# EAGLE board Schematic rangkaian krsri-1_final (EAGLE 9.6.1)
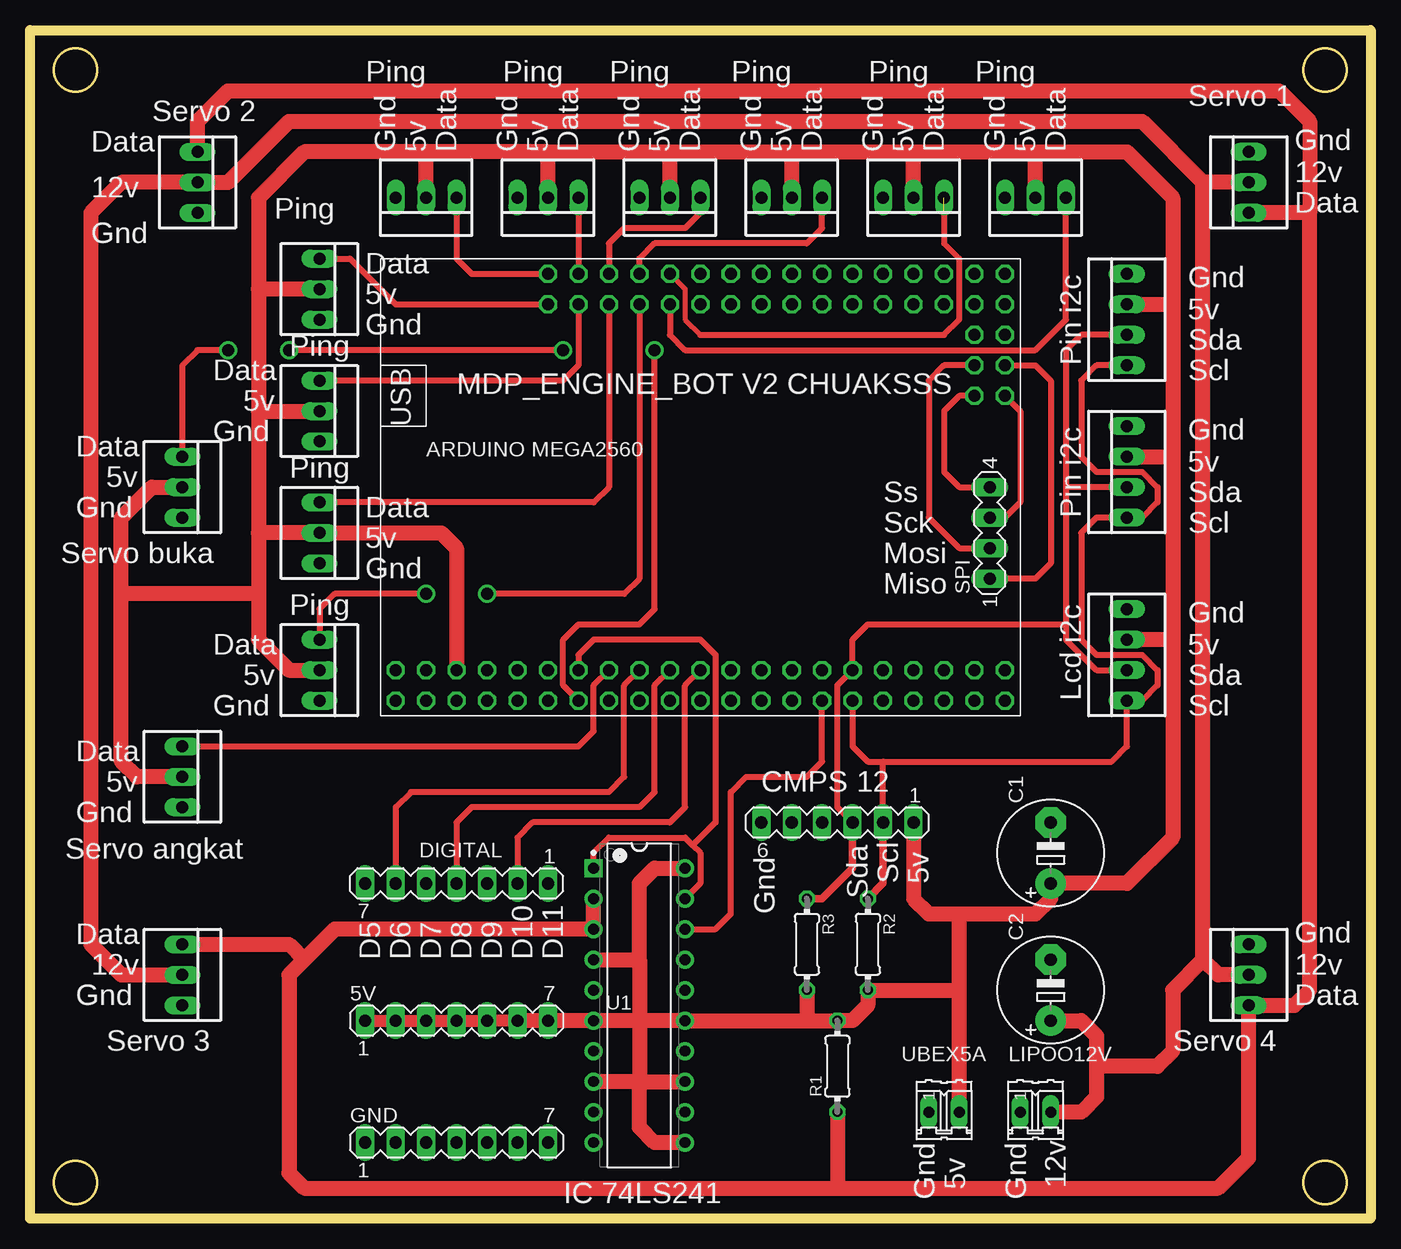
[diagram p0: board, top side]
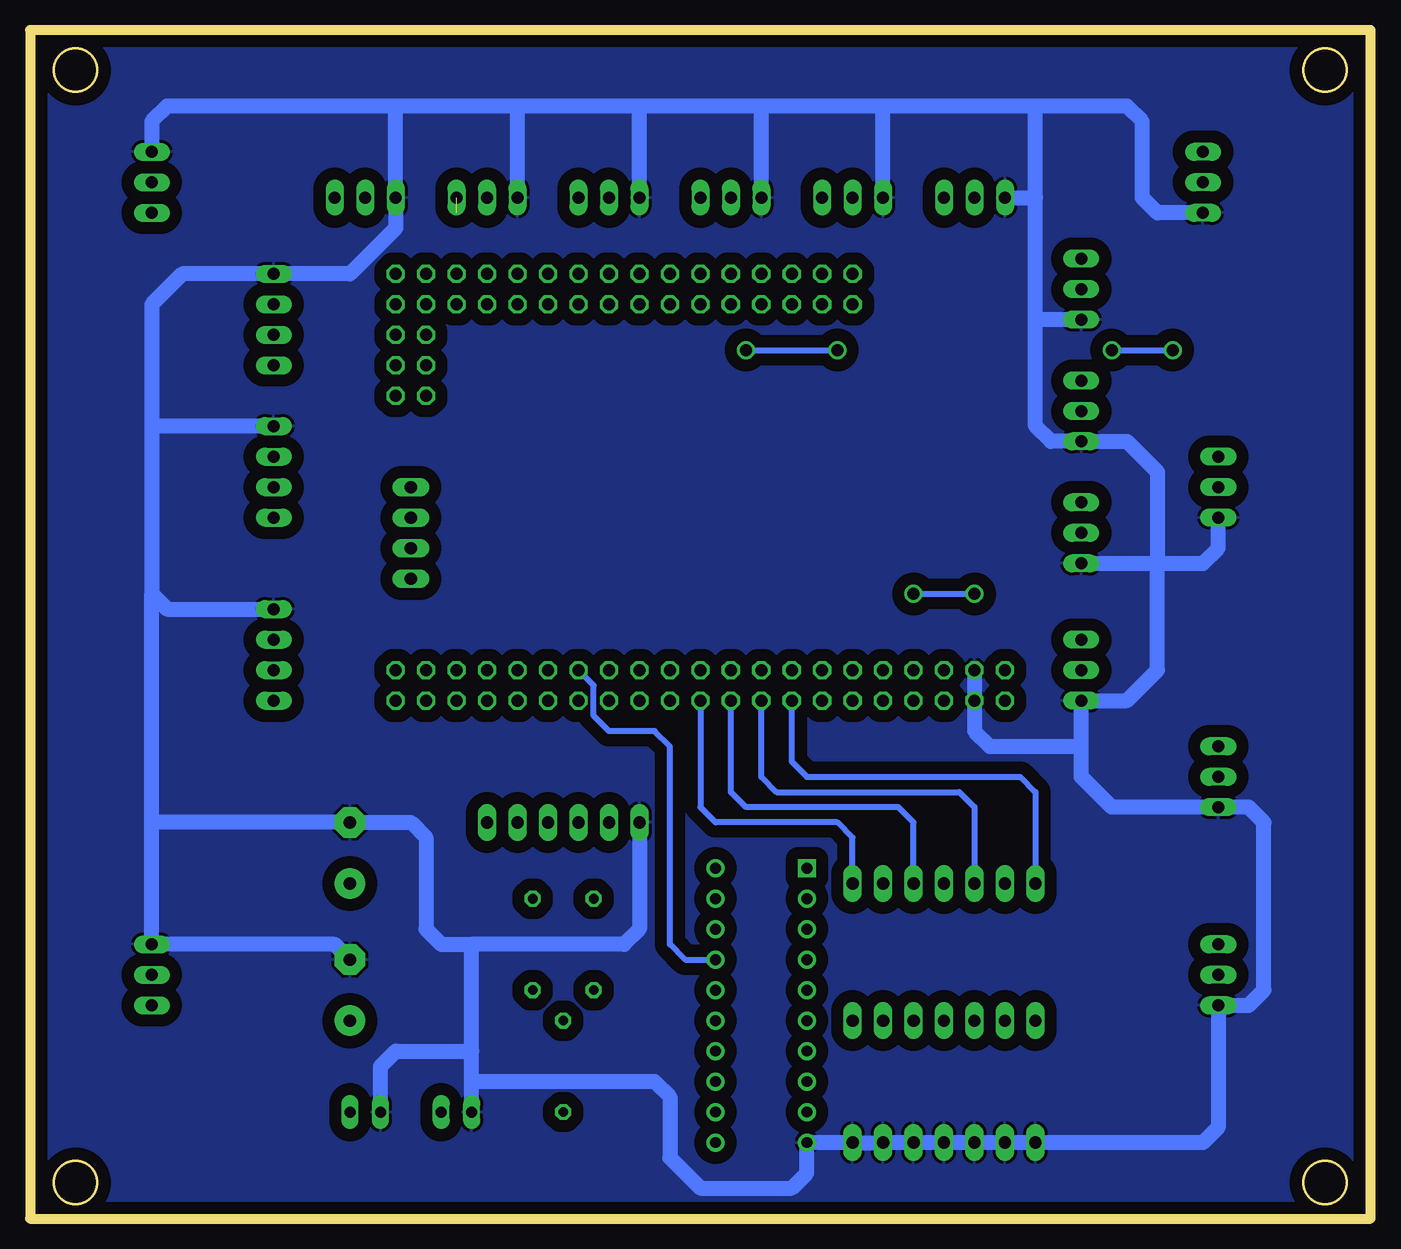
[diagram p1: board, bottom side, seen from below]

Size 111.76 x 99.06 mm. Coordinates in mm from the lower left corner, seen from the top.
Outline: 0,0 111.43,0 111.43,99.05 0,99.05 0,0
Outline: 0,0 111.76,0 111.76,99.06 0,99.06 0,0
Outline: circle at 3.81,3 radius 1.8
Outline: circle at 107.95,3 radius 1.8
Outline: circle at 107.95,95.71 radius 1.8
Outline: circle at 3.81,95.71 radius 1.8
Copper layers (1*16): Top 0.035mm / dielectric 1.5mm / Bottom 0.035mm
Design rules "default": minimum track width 6mil, minimum drill 0.35mm, track to track 6mil, track to pad 6mil, pad to pad 6mil, via to via 6mil, smd to smd 6mil, copper to edge 40mil, drill to drill 6mil, minimum pad ring 10mil, minimum via ring 8mil, stop-mask expansion 4mil, vias tented up to drill 0mil, thermal gap 10mil

## Footprints (pad centres in the part's own frame; a part is rotated, then mirrored left to right if it is on the bottom)
22-23-2031 = drill 1 long: 1 -2.54,0; 2 0,0; 3 2.54,0
MA07-1 = drill 1.016 long: 1 -7.62,0; 2 -5.08,0; 3 -2.54,0; 4 0,0; 5 2.54,0; 6 5.08,0; 7 7.62,0
E5-8,5 = drill 1.016 pad 2.54: + -2.54,0 | drill 1.016 pad 2.54 octagon: - 2.54,0
02P = drill 0.914 long: 1 -1.27,0; 2 1.27,0
MA06-1 = drill 1.016 long: 1 -6.35,0; 2 -3.81,0; 3 -1.27,0; 4 1.27,0; 5 3.81,0; 6 6.35,0
0204/7 = drill 0.813 octagon: 1 -3.81,0; 2 3.81,0
MA04-1 = drill 1.016 long: 1 -3.81,0; 2 -1.27,0; 3 1.27,0; 4 3.81,0
TEXAS_INSTRUMENTS_SN74LS241_0 = drill 0.9 pad 1.5 square: 1 -3.81,11.43 | drill 0.9 pad 1.5: 2 -3.81,8.89; 3 -3.81,6.35; 4 -3.81,3.81; 5 -3.81,1.27; 6 -3.81,-1.27; 7 -3.81,-3.81; 8 -3.81,-6.35; 9 -3.81,-8.89; 10 -3.81,-11.43; 11 3.81,-11.43; 12 3.81,-8.89; 13 3.81,-6.35; 14 3.81,-3.81; 15 3.81,-1.27; 16 3.81,1.27; 17 3.81,3.81; 18 3.81,6.35; 19 3.81,8.89; 20 3.81,11.43
MEGA2560_MIKRO = drill 1 octagon: 3V3.1 -26.67,-17.78; 3V3.2 -26.67,-20.32; +5V.1 -29.21,-17.78; +5V.2 -29.21,-20.32; A0 -21.59,15.24; A1 -21.59,12.7; A2 -19.05,15.24; A3 -19.05,12.7; A4 -16.51,15.24; A5 -16.51,12.7; A6 -13.97,15.24; A7 -13.97,12.7; A8 -11.43,15.24; A9 -11.43,12.7; A10 -8.89,15.24; A11 -8.89,12.7; A12 -6.35,15.24; A13 -6.35,12.7; A14 -3.81,15.24; A15 -3.81,12.7; AREF.1 -24.13,-17.78; D2 -19.05,-17.78; D3 -19.05,-20.32; D4 -16.51,-17.78; D5 -16.51,-20.32; D6 -13.97,-17.78; D7 -13.97,-20.32; D8 -11.43,-17.78; D9 -11.43,-20.32; D10 -8.89,-17.78; D11 -8.89,-20.32; D12 -6.35,-17.78; D13 -6.35,-20.32; D14 -3.81,-17.78; D15 -3.81,-20.32; D16 -1.27,-17.78; D17 -1.27,-20.32; D18 1.27,-17.78; D19 1.27,-20.32; D20 3.81,-17.78; D21 3.81,-20.32; D22 6.35,-17.78; D23 6.35,-20.32; D24 8.89,-17.78; D25 8.89,-20.32; D26 11.43,-17.78; D27 11.43,-20.32; D28 13.97,-17.78; D29 13.97,-20.32; D30 16.51,-17.78; D31 16.51,-20.32; D32 -1.27,15.24; D33 -1.27,12.7; D34 1.27,15.24; D35 1.27,12.7; D36 3.81,15.24; D37 3.81,12.7; D38 6.35,15.24; D39 6.35,12.7; D40 8.89,15.24; D41 8.89,12.7; D42 11.43,15.24; D43 11.43,12.7; D44 13.97,15.24; D45 13.97,12.7; D46 16.51,15.24; D47 16.51,12.7; D48 16.51,10.16; D49 13.97,10.16; D50 16.51,7.62; D51 13.97,7.62; D52 16.51,5.08; D53 13.97,5.08; GND.1 -31.75,-17.78; GND.2 -31.75,-20.32; RST -24.13,-20.32; RX -21.59,-17.78; TX -21.59,-20.32; VIN.1 -34.29,-17.78; VIN.2 -34.29,-20.32
22-23-2041 = drill 1 long: 1 -3.81,0; 2 -1.27,0; 3 1.27,0; 4 3.81,0

## Placement (x,y rotation side)
1  Ping1  [22-23-2031]  33.02,85.09 180 top
5V  [MA07-1]  35.56,16.51 0 top
.  Dynamixel kaki 2  [22-23-2031]  12.7,20.32 270 top
AS  SRV angkat  [22-23-2031]  12.7,36.83 270 top
C1  10uf/50v  [E5-8,5]  85.09,30.48 90 top
C2  10uf/50v  [E5-8,5]  85.09,19.05 90 top
DIGITAL  [MA07-1]  35.56,27.94 180 top
GND  [MA07-1]  35.56,6.35 0 top
LIPOO12V  [02P]  83.82,8.89 0 top
MCPS12  [MA06-1]  67.31,33.02 180 top
R1  10k  [0204/7]  67.31,12.7 90 top
R2  1k  [0204/7]  69.85,22.86 270 top
R3  1k  [0204/7]  64.77,22.86 270 top
S2  Ping2  [22-23-2031]  24.13,77.47 270 top
S3  Ping3  [22-23-2031]  43.18,85.09 180 top
S4  Ping4  [22-23-2031]  24.13,67.31 270 top
S5  Ping5  [22-23-2031]  53.34,85.09 180 top
S6  Ping6  [22-23-2031]  24.13,57.15 270 top
S7  Ping7  [22-23-2031]  63.5,85.09 180 top
S8  Ping8  [22-23-2031]  24.13,45.72 270 top
S9  Ping9  [22-23-2031]  73.66,85.09 180 top
S10  Ping10  [22-23-2031]  83.82,85.09 180 top
SERVO  SRV BUKA  [22-23-2031]  12.7,60.96 270 top
SERVO1  Dynamixel kaki 1  [22-23-2031]  101.6,20.32 90 top
SERVO4  Dynamixel kaki 3  [22-23-2031]  13.97,86.36 270 top
SERVO5  Dynamixel kaki 4  [22-23-2031]  101.6,86.36 90 top
SPI  [MA04-1]  80.01,57.15 90 top
U1  TEXAS_INSTRUMENTS_SN74LS241TEXAS_INSTRUMENTS_SN74LS241_0_0  [TEXAS_INSTRUMENTS_SN74LS241_0]  50.8,17.78 0 top
U$1  MEGA2560_MIKRO  [MEGA2560_MIKRO]  64.77,63.5 0 top
UBEX5A  [02P]  76.2,8.89 0 top
X1  LCD 16x2  [22-23-2041]  91.44,62.23 90 top
X2  I2C  [22-23-2041]  91.44,74.93 90 top
X3  I2C  [22-23-2041]  91.44,46.99 90 top

## Library data of the parts
1 . AS S2-S10 SERVO SERVO1 SERVO4 SERVO5 = con-molex; MF: MOLEX; MPN: 22-23-2031; OC_FARNELL: 1462950; OC_NEWARK: 30C0862
5V DIGITAL GND MCPS12 SPI = con-lstb; OC_FARNELL: unknown; OC_NEWARK: unknown
C1 C2 = rcl; SPICEPREFIX: C
LIPOO12V UBEX5A = con-amp-quick; OC_FARNELL: unknown; OC_NEWARK: unknown
R1-R3 = rcl; SPICEPREFIX: R
U1 = SN74LS241; BITS: 8; CIIVA_IDS: 1348755; CODE__JEDEC: MS-001; DATASHEET_VERSION: SDLS144C; FOOTPRINT_VARIANT_NAME_0: Manufacturer Recommended; F__NOM_VOLTAGEMAXMHZ: 35; ICC__NOM_VOLTAGEMAXMA: 0.046; IMPORTED: yes; IMPORTED_FROM: vault; IMPORT_TS: 1521851976; INPUT_TYPE: TTL; MF: Texas Instruments; MPN: SN74LS241; OPERATING_TEMPERATURE_RANGEC: 0 to 70; OUTPUT_TYPE: TTL; PACKAGE: N0020A; PACKAGE_VERSION: http://www.ti.com/lit/ml/mpdi002c/mpdi002c.pdf; PREFIX: U; RATING: Catalog; RELEASE_DATE: 1459239443; TPD__NOM_VOLTAGEMAXNS: 18; VAULT_GUID: 3451E144-C486-4A48-AD08-3F2E02F82C0D; VAULT_REVISION: 66FE7A36-A9A5-40CE-8C73-C07E9184559F; VCC_MAX_V: 5.25; VCC_MIN_V: 4.75; VOLTAGE_NOM_V: 5
U$1 = MIKRO_MEGA2560
X1-X3 = con-molex; MF: MOLEX; MPN: 22-23-2041; OC_FARNELL: 1462920; OC_NEWARK: 38C0355

## Nets
+5V: 1.2 5V.1 5V.2 5V.3 5V.4 5V.5 5V.6 5V.7 AS.2 C1.+ MCPS12.1 R1.2 R2.2 R3.2 S2.2 S3.2 S4.2 S5.2 S6.2 S7.2 S8.2 S9.2 S10.2 SERVO.2 U1.4 U1.6 U1.8 U1.11 U1.13 U1.15 U1.20 U$1.+5V.1 UBEX5A.2 X1.3 X2.3 X3.3
+12V: ..2 C2.+ LIPOO12V.2 SERVO1.2 SERVO4.2 SERVO5.2
DAT: ..1 R1.1 SERVO1.1 SERVO4.1 SERVO5.1 U1.2 U1.3
DC: U1.1 U1.19 U$1.D2
GND: 1.3 ..3 AS.3 C1.- C2.- GND.1 GND.2 GND.3 GND.4 GND.5 GND.6 GND.7 LIPOO12V.1 MCPS12.6 S2.3 S3.3 S4.3 S5.3 S6.3 S7.3 S8.3 S9.3 S10.3 SERVO1.3 SERVO4.3 SERVO5.3 SERVO.3 U1.10 U$1.GND.1 U$1.GND.2 UBEX5A.1 X1.4 X2.4 X3.4
N$1: SPI.4 U$1.D53
N$2: DIGITAL.7 U$1.D5
N$3: DIGITAL.6 U$1.D6
N$4: DIGITAL.5 U$1.D7
N$5: DIGITAL.4 U$1.D8
N$6: DIGITAL.3 U$1.D9
N$7: DIGITAL.2 U$1.D10
N$8: DIGITAL.1 U$1.D11
N$9: SPI.3 U$1.D52
N$10: SPI.2 U$1.D51
N$11: SPI.1 U$1.D50
PING1: 1.1 U$1.A0
PING2: S2.1 U$1.A1
PING3: S3.1 U$1.A2
PING4: S4.1 U$1.A3
PING5: S5.1 U$1.A4
PING6: S6.1 U$1.A5
PING7: S7.1 U$1.A6
PING8: S8.1 U$1.A7
PING9: S9.1 U$1.A8
PING10: S10.1 U$1.A9
RX: U1.18 U$1.D19
SCL: MCPS12.2 R2.1 U$1.D21 X1.1 X2.1 X3.1
SDA: MCPS12.3 R3.1 U$1.D20 X1.2 X2.2 X3.2
SRV1: SERVO.1 U$1.D3
SRV2: AS.1 U$1.D4
TX: U1.17 U$1.D18

## Tracks (layer width: path | path; a pad name or v marks a point on that pad's centre or on a via)
+5V
  Top 1.016: 5V.6 5V.5 5V.4 5V.3 5V.2 5V.1
  Top 1.27: 93.98,76.2 X2.3 95.25,76.2 | 95.25,76.2 95.25,63.5 | 95.25,63.5 95.25,48.26 | 95.25,48.26 X3.3 | X1.3 95.25,63.5 | 43.18,88.9 53.34,88.9 | 53.34,88.9 63.5,88.9 | 63.5,88.9 73.66,88.9 | 73.66,88.9 83.82,88.9 | S9.2 73.66,88.9 | S7.2 63.5,88.9 | S5.2 53.34,88.9 | S3.2 43.18,88.9 | 19.05,67.31 S4.2 | 19.05,77.47 19.05,67.31 | S2.2 19.05,77.47 | MCPS12.1 73.66,26.67 74.93,25.4 77.47,25.4 | 77.47,25.4 83.82,25.4 85.09,26.67 C1.+ 91.44,27.94 95.25,31.75 95.25,48.26 | UBEX5A.2 77.47,19.05 | 77.47,19.05 77.47,25.4 | R3.2 64.77,16.51 | 77.47,19.05 R2.2 69.85,17.78 68.58,16.51 R1.2 64.77,16.51 | U$1.+5V.1 35.56,55.88 34.29,57.15 S6.2 19.05,57.15 | 50.8,11.43 U1.8 | 50.8,11.43 U1.13 | 50.8,16.51 U1.15 64.77,16.51 | 50.8,16.51 U1.6 5V.7 5V.6 | 50.8,16.51 50.8,11.43 | U1.4 50.8,21.59 | 50.8,21.59 50.8,16.51 | 50.8,21.59 50.8,27.94 52.07,29.21 U1.20 | 83.82,88.9 91.44,88.9 95.25,85.09 95.25,76.2 | 19.05,77.47 19.05,85.09 22.86,88.9 33.02,88.9 | 43.18,88.9 33.02,88.9 | 1.2 33.02,88.9 | S10.2 83.82,88.9 | S8.2 21.59,45.72 19.05,48.26 19.05,52.07 | U1.11 52.07,6.35 50.8,7.62 50.8,11.43 | AS.2 8.89,36.83 7.62,38.1 7.62,52.07 | 7.62,52.07 7.62,58.42 10.16,60.96 SERVO.2 | 19.05,57.15 19.05,52.07 | 19.05,52.07 7.62,52.07 | 19.05,67.31 19.05,57.15
+12V
  Top 1.27: SERVO4.2 15.24,86.36 | SERVO4.2 7.62,86.36 5.08,83.82 5.08,22.86 7.62,20.32 ..2 | C2.+ 87.63,16.51 88.9,15.24 88.9,12.7 | 88.9,12.7 88.9,10.16 87.63,8.89 LIPOO12V.2 | 100.33,86.36 SERVO5.2 97.79,86.36 | 97.79,86.36 92.71,91.44 21.59,91.44 16.51,86.36 SERVO4.2 | SERVO1.2 99.06,20.32 97.79,21.59 | 97.79,21.59 97.79,86.36 | 97.79,21.59 95.25,19.05 95.25,13.97 93.98,12.7 88.9,12.7
DAT
  Top 0.508: 102.87,83.82 SERVO5.1
  Top 1.27: U1.2 U1.3 25.4,24.13 22.86,21.59 | 22.86,21.59 21.59,20.32 21.59,3.81 22.86,2.54 67.31,2.54 | ..1 21.59,22.86 22.86,21.59 | 106.68,83.82 106.68,19.05 105.41,17.78 SERVO1.1 101.6,5.08 99.06,2.54 67.31,2.54 | 106.68,83.82 SERVO5.1 | SERVO4.1 13.97,91.44 16.51,93.98 104.14,93.98 106.68,91.44 106.68,83.82 | R1.1 67.31,2.54
DC
  Top 0.508: U$1.D2 45.72,46.99 46.99,48.26 55.88,48.26 57.15,46.99 57.15,33.02 55.24,31.11 | U1.19 55.88,27.94 55.88,30.48 55.24,31.11 | U1.1 46.99,30.48 48.26,31.75 54.61,31.75 55.24,31.11
GND
  Bottom 1.27: U$1.GND.1 U$1.GND.2 33.02,40.64 31.75,39.37 24.13,39.37 | SERVO4.3 17.78,83.82 19.05,85.09 19.05,91.44 20.32,92.71 27.94,92.71 | 27.94,92.71 40.64,92.71 | 40.64,92.71 50.8,92.71 | 50.8,92.71 60.96,92.71 | 60.96,92.71 71.12,92.71 | 71.12,92.71 81.28,92.71 | S2.3 27.94,74.93 | 27.94,74.93 27.94,85.09 | 27.94,85.09 27.94,92.71 | 1.3 27.94,85.09 | S3.3 40.64,92.71 | S5.3 50.8,92.71 | S7.3 60.96,92.71 | S9.3 71.12,92.71 | 81.28,92.71 S10.3 81.28,82.55 85.09,78.74 X2.4 99.06,78.74 101.6,76.2 101.6,66.04 | MCPS12.6 60.96,24.13 62.23,22.86 74.93,22.86 | 27.94,74.93 27.94,66.04 26.67,64.77 S4.3 20.32,64.77 17.78,62.23 17.78,54.61 | 81.28,92.71 100.33,92.71 101.6,91.44 SERVO5.3 | 74.93,22.86 77.47,22.86 78.74,24.13 78.74,31.75 80.01,33.02 C1.- 101.6,33.02 | UBEX5A.1 74.93,11.43 | 74.93,11.43 74.93,13.97 | 74.93,13.97 74.93,22.86 | 74.93,11.43 59.69,11.43 58.42,10.16 58.42,5.08 55.88,2.54 48.26,2.54 46.99,3.81 U1.10 GND.7 GND.6 GND.5 GND.4 GND.3 GND.2 GND.1 13.97,6.35 12.7,7.62 ..3 10.16,17.78 8.89,19.05 8.89,33.02 10.16,34.29 AS.3 21.59,34.29 24.13,36.83 24.13,39.37 | C2.- 86.36,22.86 SERVO1.3 101.6,33.02 | LIPOO12V.1 82.55,12.7 81.28,13.97 74.93,13.97 | 24.13,39.37 S8.3 20.32,43.18 17.78,45.72 17.78,54.61 | S6.3 17.78,54.61 | SERVO.3 12.7,55.88 13.97,54.61 17.78,54.61 | 101.6,52.07 100.33,50.8 X3.4 | 101.6,66.04 101.6,52.07 | X1.4 101.6,66.04 | 101.6,33.02 101.6,52.07
  pour Bottom (isolate 1.016): 0,99.06 111.76,99.06 111.76,0 0,0
N$1
  Top 0.508: U$1.D53 77.47,68.58 76.2,67.31 76.2,62.23 77.47,60.96 SPI.4
N$2
  Bottom 0.508: U$1.D5 48.26,38.1 46.99,36.83 29.21,36.83 27.94,35.56 DIGITAL.7
N$3
  Top 0.508: U$1.D6 49.53,44.45 49.53,36.83 48.26,35.56 31.75,35.56 30.48,34.29 DIGITAL.6
N$4
  Bottom 0.508: U$1.D7 50.8,36.83 49.53,35.56 34.29,35.56 33.02,34.29 DIGITAL.5
N$5
  Top 0.508: U$1.D8 52.07,44.45 52.07,35.56 50.8,34.29 36.83,34.29 35.56,33.02 DIGITAL.4
N$6
  Bottom 0.508: U$1.D9 53.34,35.56 52.07,34.29 39.37,34.29 38.1,33.02 DIGITAL.3
N$7
  Top 0.508: U$1.D10 54.61,44.45 54.61,34.29 53.34,33.02 41.91,33.02 40.64,31.75 DIGITAL.2
N$8
  Bottom 0.508: U$1.D11 55.88,34.29 54.61,33.02 44.45,33.02 43.18,31.75 DIGITAL.1
N$9
  Top 0.508: SPI.3 81.28,58.42 82.55,59.69 82.55,67.31 U$1.D52
N$10
  Top 0.508: U$1.D51 76.2,71.12 74.93,69.85 74.93,58.42 77.47,55.88 SPI.2
N$11
  Top 0.508: U$1.D50 83.82,71.12 85.09,69.85 85.09,54.61 83.82,53.34 SPI.1
PING1
  Top 0.508: 1.1 35.56,80.01 36.83,78.74 U$1.A0
PING2
  Top 0.508: S2.1 26.67,80.01 30.48,76.2 U$1.A1
PING3
  Top 0.508: S3.1 U$1.A2
PING4
  Top 0.508: U$1.A3 45.72,71.12 44.45,69.85 S4.1
PING5
  Top 0.508: S5.1 55.88,83.82 54.61,82.55 49.53,82.55 48.26,81.28 U$1.A4
PING6
  Top 0.508: U$1.A5 48.26,60.96 46.99,59.69 S6.1
PING7
  Top 0.508: U$1.A6 50.8,80.01 52.07,81.28 64.77,81.28 66.04,82.55 S7.1
PING8  (via drill 1)
  Top 0.508: U$1.A7 50.8,53.34 49.53,52.07 v38.1,52.07 | S8.1 24.13,50.8 25.4,52.07 v33.02,52.07
  Bottom 0.508: v38.1,52.07 v33.02,52.07
PING9  (1 unrouted)
  Top 0.406: U$1.A8 54.61,77.47 54.61,74.93 55.88,73.66 | 76.2,81.28 77.47,80.01
  Top 0.508: 55.88,73.66 76.2,73.66 77.47,74.93 77.47,80.01 | 76.2,83.82 76.2,81.28
PING10
  Top 0.508: U$1.A9 53.34,73.66 54.61,72.39 83.82,72.39 86.36,74.93 S10.1
RX
  Top 0.508: U1.18 57.15,24.13 58.42,25.4 58.42,35.56 59.69,36.83 64.77,36.83 66.04,38.1 U$1.D19
SCL
  Top 0.508: U$1.D21 68.58,39.37 69.85,38.1 71.12,38.1 | 71.12,38.1 90.17,38.1 91.44,39.37 X3.1 92.71,43.18 93.98,44.45 93.98,45.72 92.71,46.99 88.9,46.99 87.63,48.26 87.63,57.15 88.9,58.42 X1.1 92.71,58.42 93.98,59.69 93.98,60.96 92.71,62.23 88.9,62.23 87.63,63.5 87.63,69.85 88.9,71.12 X2.1 | MCPS12.2 71.12,38.1
  Top 0.61: R2.1 71.12,27.94 MCPS12.2
SDA
  Top 0.508: MCPS12.3 67.31,34.29 67.31,44.45 U$1.D20 68.58,48.26 69.85,49.53 86.36,49.53 | X2.2 87.63,73.66 86.36,72.39 86.36,60.96 | 86.36,60.96 86.36,49.53 | 86.36,49.53 86.36,48.26 88.9,45.72 X3.2 | X1.2 86.36,60.96
  Top 0.61: MCPS12.3 68.58,29.21 66.04,26.67 R3.1
SRV1  (via drill 1)
  Top 0.508: v16.51,72.39 13.97,72.39 12.7,71.12 SERVO.1 | U$1.D3 44.45,44.45 44.45,48.26 45.72,49.53 50.8,49.53 52.07,50.8 v52.07,72.39 | v44.45,72.39 v21.59,72.39
  Bottom 0.508: v52.07,72.39 v44.45,72.39 | v21.59,72.39 v16.51,72.39
SRV2
  Top 0.508: AS.1 45.72,39.37 46.99,40.64 46.99,44.45 U$1.D4
TX
  Bottom 0.508: U1.17 57.15,21.59 58.42,22.86 58.42,39.37 59.69,40.64 63.5,40.64 64.77,41.91 64.77,44.45 U$1.D18

## Text on the board
tNames: Ping | Ping | Ping | Ping | Ping | Ping | Servo 1 | Servo 2 | Data | Gnd | 5v | Data | Gnd | 5v | Data | Gnd | 5v | Data | Gnd | 5v | Data | Gnd | 5v | Data | Gnd | 5v | Data | 12v | Gnd | 12v | Ping | Data | Gnd | Data | 5v | 5v | Gnd | Ping | Gnd | Sda | Pin i2c | Data | Scl | 5v | MDP_ENGINE_BOT V2 CHUAKSSS | Gnd | Data | Ping | 5v | Gnd | 5v | Ss | Sda | Gnd | Data | Pin i2c | Sck | Scl | 5v | Servo buka | Mosi | Gnd | Ping | Miso | Data | 5v | Gnd | 5v | Sda | Lcd i2c | Gnd | Scl | Data | 5v | CMPS 12 | Gnd | Servo angkat | Scl | 5v | Sda | Gnd | Data | D5 | D6 | D7 | D8 | D9 | D10 | D11 | 12v | 12v | Gnd | Gnd | Data | Servo 3 | Servo 4 | Gnd | Gnd | 5v | 12v | IC 74LS241